# Altium PCB KUOZHAN.PCBDOC (part 15 of 21)
Units mm, origin at the board's own origin, x right, y up, seen from the top; angles counter-clockwise.
Board outline 165.51 x 116.38 mm, 2 copper layers (Top Layer, Bottom Layer); 171 components, 245 nets, 894 pads, 298 vias.
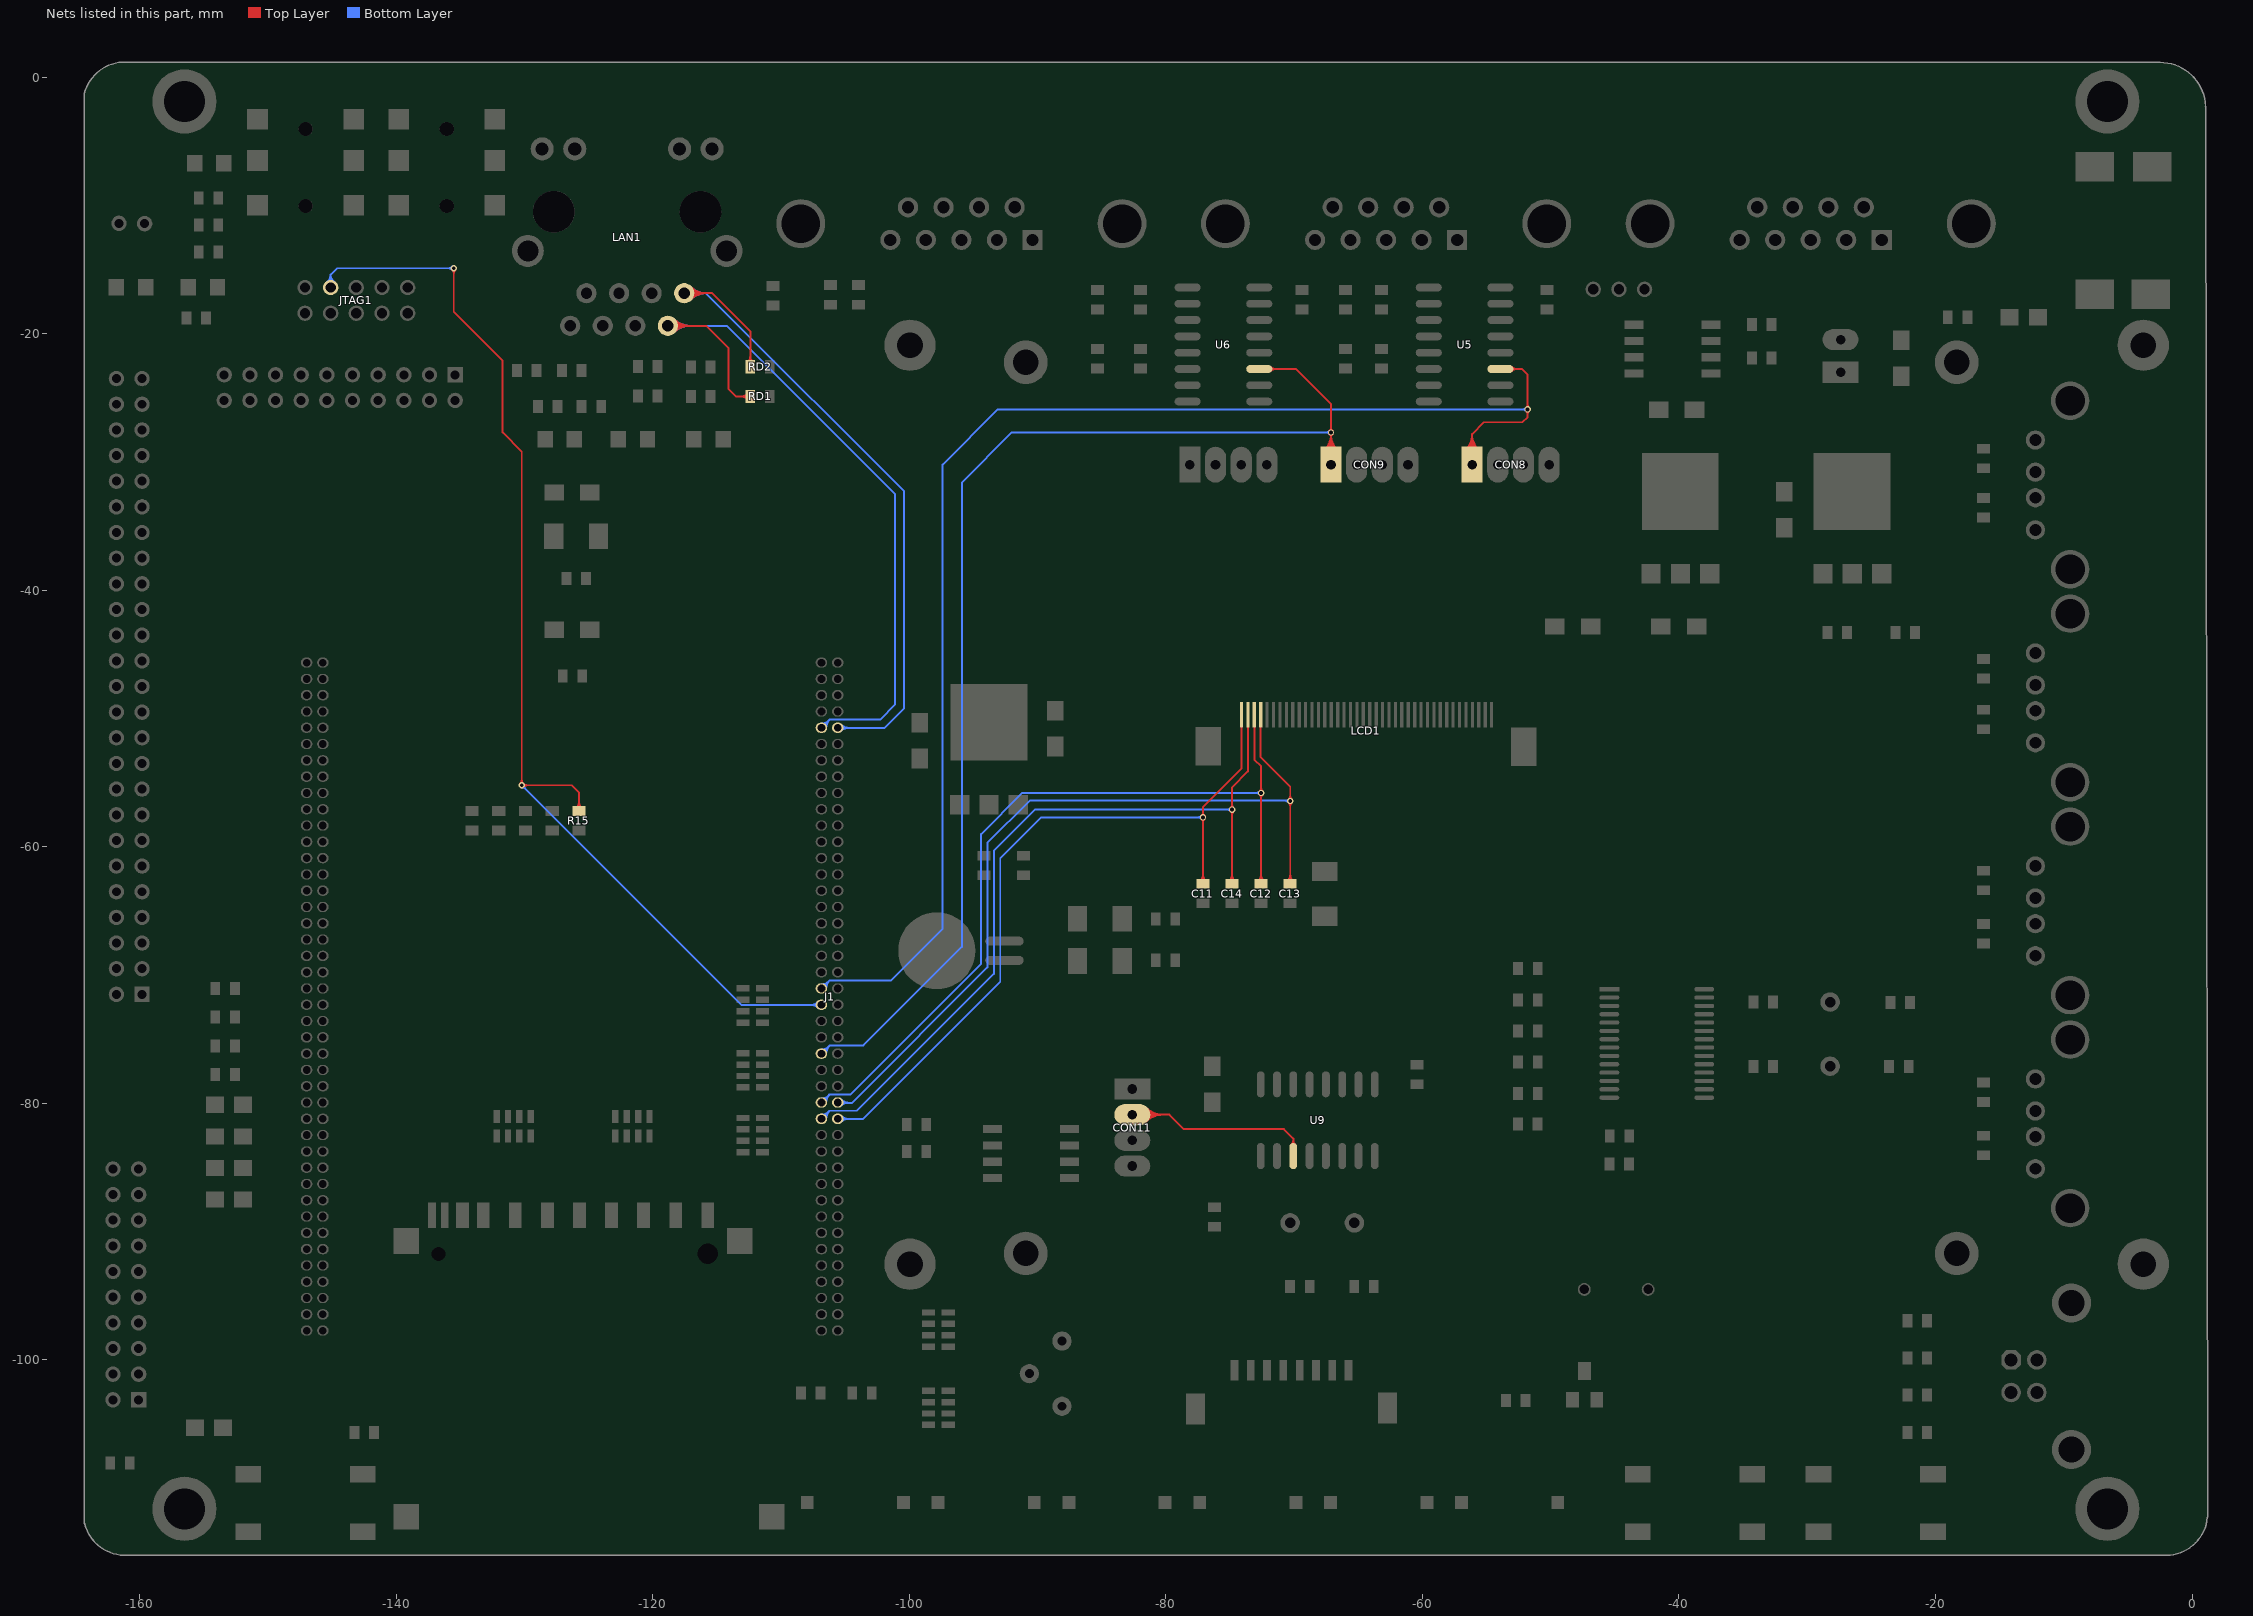
[diagram p15: the nets of this part, all layers, seen from the top]

## Via types
v1: diameter 0.5, hole 0.3, Top Layer to Bottom Layer, 272 vias
v2: diameter 0.6, hole 0.3, Top Layer to Bottom Layer, 24 vias
v3: diameter 0.9, hole 0.9, Top Layer to Bottom Layer, 2 vias

## Nets (pads, with @x,y where several pads share a name; then routed paths per layer and width w, separated by ;. In a path a pad name is that pad's centre, name@x,y a point inside that pad or via, vN(x,y) a via of type N, cw(c..) or ccw(c..) an arc to the next point about the centre after c; other vN are vias at no path point) (continued)
TMS: J1.43 JTAG1.7 R15.2 | length 131.8
  Top Layer w0.15: v1@-135.588,-14.988 cw(c-135.802,-15.202) -135.5,-15.202 cw(c-135.198,-15.202) v1@-135.412,-14.988 ; v1(-135.5,-14.9) -135.5,-18.293 -131.7,-22.093 -131.7,-27.7 -130.2,-29.2 v1(-130.2,-55.2) -126.3,-55.2 -125.741,-55.759 R15.2@-125.741,-57.2 ; v1@-130.288,-55.112 ccw(c-130.502,-54.898) -130.2,-54.898 ccw(c-129.898,-54.898) -130.112,-55.112 ccw(c-129.898,-54.898) -129.898,-55.2 ccw(c-129.898,-55.502) v1@-130.112,-55.288 ; v1@-135.624,-15.024 cw(c-135.922,-15.322) -135.5,-15.322 ; v1@-135.624,-15.024 cw(c-135.922,-15.322) -135.5,-15.322 ; v1@-135.624,-15.024 cw(c-135.922,-15.322) -135.5,-15.322 ; v1@-135.624,-15.024 cw(c-135.922,-15.322) -135.5,-15.322 ; -135.5,-15.322 cw(c-135.078,-15.322) v1@-135.376,-15.024 ; -135.5,-15.322 cw(c-135.078,-15.322) v1@-135.376,-15.024 ; -135.5,-15.322 cw(c-135.078,-15.322) v1@-135.376,-15.024 ; -135.5,-15.322 cw(c-135.078,-15.322) v1@-135.376,-15.024 ; v1@-130.324,-55.076 ccw(c-130.622,-54.778) -130.2,-54.778 ; v1@-130.324,-55.076 ccw(c-130.622,-54.778) -130.2,-54.778 ; v1@-130.324,-55.076 ccw(c-130.622,-54.778) -130.2,-54.778 ; v1@-130.324,-55.076 ccw(c-130.622,-54.778) -130.2,-54.778 ; -130.2,-54.778 ccw(c-129.778,-54.778) v1@-130.076,-55.076 ; -130.2,-54.778 ccw(c-129.778,-54.778) v1@-130.076,-55.076 ; -130.2,-54.778 ccw(c-129.778,-54.778) v1@-130.076,-55.076 ; -130.2,-54.778 ccw(c-129.778,-54.778) v1@-130.076,-55.076 ; v1@-130.076,-55.324 cw(c-129.778,-55.622) -129.778,-55.2 ; v1@-130.076,-55.324 cw(c-129.778,-55.622) -129.778,-55.2 ; v1@-130.076,-55.324 cw(c-129.778,-55.622) -129.778,-55.2 ; v1@-130.076,-55.324 cw(c-129.778,-55.622) -129.778,-55.2 ; v1@-130.076,-55.076 ccw(c-129.778,-54.778) -129.778,-55.2 ; v1@-130.076,-55.076 ccw(c-129.778,-54.778) -129.778,-55.2 ; v1@-130.076,-55.076 ccw(c-129.778,-54.778) -129.778,-55.2 ; v1@-130.076,-55.076 ccw(c-129.778,-54.778) -129.778,-55.2 ; R15.2@-125.957,-56.984 ccw(c-126.48,-56.461) -125.741,-56.461 ; R15.2@-125.957,-56.984 ccw(c-126.48,-56.461) -125.741,-56.461 ; R15.2@-125.957,-56.984 ccw(c-126.48,-56.461) -125.741,-56.461 ; R15.2@-125.957,-56.984 ccw(c-126.48,-56.461) -125.741,-56.461 ; R15.2@-125.957,-56.984 ccw(c-126.48,-56.461) -125.741,-56.461 ; -125.741,-56.461 ccw(c-125.002,-56.461) R15.2@-125.524,-56.984 ; -125.741,-56.461 ccw(c-125.002,-56.461) R15.2@-125.524,-56.984 ; -125.741,-56.461 ccw(c-125.002,-56.461) R15.2@-125.524,-56.984 ; -125.741,-56.461 ccw(c-125.002,-56.461) R15.2@-125.524,-56.984 ; -125.741,-56.461 ccw(c-125.002,-56.461) R15.2@-125.524,-56.984
  Bottom Layer w0.15: JTAG1.7@-145.099,-16.403 -145.099,-15.399 ; v1@-135.588,-14.988 ccw(c-135.802,-15.202) -135.802,-14.9 ccw(c-135.802,-14.598) v1@-135.588,-14.812 ; v1(-135.5,-14.9) -144.6,-14.9 -145.099,-15.399 ; v1@-130.2,-55.325 cw(c-130.2,-55.627) -129.987,-55.413 cw(c-129.773,-55.2) v1@-130.075,-55.2 ; v1(-130.2,-55.2) -113.073,-72.327 J1.43@-106.841,-72.327 ; JTAG1.7@-145.398,-15.971 ccw(c-145.796,-15.399) -145.099,-15.399 ; JTAG1.7@-145.398,-15.971 ccw(c-145.796,-15.399) -145.099,-15.399 ; JTAG1.7@-145.398,-15.971 ccw(c-145.796,-15.399) -145.099,-15.399 ; JTAG1.7@-145.398,-15.971 ccw(c-145.796,-15.399) -145.099,-15.399 ; JTAG1.7@-145.398,-15.971 ccw(c-145.796,-15.399) -145.099,-15.399 ; JTAG1.7@-145.313,-16.095 ccw(c-145.597,-15.686) -145.099,-15.686 ; JTAG1.7@-145.313,-16.095 ccw(c-145.597,-15.686) -145.099,-15.686 ; JTAG1.7@-145.313,-16.095 ccw(c-145.597,-15.686) -145.099,-15.686 ; JTAG1.7@-145.313,-16.095 ccw(c-145.597,-15.686) -145.099,-15.686 ; JTAG1.7@-145.313,-16.095 ccw(c-145.597,-15.686) -145.099,-15.686 ; -145.099,-15.686 ccw(c-144.601,-15.686) JTAG1.7@-144.885,-16.095 ; -145.099,-15.686 ccw(c-144.601,-15.686) JTAG1.7@-144.885,-16.095 ; -145.099,-15.686 ccw(c-144.601,-15.686) JTAG1.7@-144.885,-16.095 ; -145.099,-15.686 ccw(c-144.601,-15.686) JTAG1.7@-144.885,-16.095 ; -145.099,-15.686 ccw(c-144.601,-15.686) JTAG1.7@-144.885,-16.095 ; -145.099,-15.399 ccw(c-144.402,-15.399) JTAG1.7@-144.799,-15.971 ; -145.099,-15.399 ccw(c-144.402,-15.399) JTAG1.7@-144.799,-15.971 ; -145.099,-15.399 ccw(c-144.402,-15.399) JTAG1.7@-144.799,-15.971 ; -145.099,-15.399 ccw(c-144.402,-15.399) JTAG1.7@-144.799,-15.971 ; -145.099,-15.399 ccw(c-144.402,-15.399) JTAG1.7@-144.799,-15.971 ; -135.922,-14.9 cw(c-135.922,-15.322) v1@-135.624,-15.024 ; -135.922,-14.9 ccw(c-135.922,-14.478) v1@-135.624,-14.776 ; -135.922,-14.9 cw(c-135.922,-15.322) v1@-135.624,-15.024 ; -135.922,-14.9 ccw(c-135.922,-14.478) v1@-135.624,-14.776 ; -135.922,-14.9 cw(c-135.922,-15.322) v1@-135.624,-15.024 ; -135.922,-14.9 ccw(c-135.922,-14.478) v1@-135.624,-14.776 ; -135.922,-14.9 ccw(c-135.922,-14.478) v1@-135.624,-14.776 ; -135.922,-14.9 cw(c-135.922,-15.322) v1@-135.624,-15.024 ; v1@-130.2,-55.375 cw(c-130.2,-55.797) -129.901,-55.499 ; v1@-130.2,-55.375 cw(c-130.2,-55.797) -129.901,-55.499 ; v1@-130.2,-55.375 cw(c-130.2,-55.797) -129.901,-55.499 ; v1@-130.2,-55.375 cw(c-130.2,-55.797) -129.901,-55.499 ; v1@-130.025,-55.2 ccw(c-129.603,-55.2) -129.901,-55.499 ; v1@-130.025,-55.2 ccw(c-129.603,-55.2) -129.901,-55.499 ; v1@-130.025,-55.2 ccw(c-129.603,-55.2) -129.901,-55.499 ; v1@-130.025,-55.2 ccw(c-129.603,-55.2) -129.901,-55.499 ; -107.625,-72.327 cw(c-107.625,-73.111) J1.43@-107.071,-72.557 ; -107.625,-72.327 ccw(c-107.625,-71.542) J1.43@-107.071,-72.097 ; -107.625,-72.327 cw(c-107.625,-73.111) J1.43@-107.071,-72.557 ; -107.625,-72.327 ccw(c-107.625,-71.542) J1.43@-107.071,-72.097 ; -107.625,-72.327 cw(c-107.625,-73.111) J1.43@-107.071,-72.557 ; -107.625,-72.327 ccw(c-107.625,-71.542) J1.43@-107.071,-72.097 ; J1.43@-107.263,-72.327 cw(c-107.263,-72.749) J1.43@-106.965,-72.451 ; J1.43@-107.263,-72.327 ccw(c-107.263,-71.904) J1.43@-106.965,-72.203 ; J1.43@-107.263,-72.327 cw(c-107.263,-72.749) J1.43@-106.965,-72.451 ; J1.43@-107.263,-72.327 ccw(c-107.263,-71.904) J1.43@-106.965,-72.203 ; J1.43@-107.263,-72.327 cw(c-107.263,-72.749) J1.43@-106.965,-72.451 ; J1.43@-107.263,-72.327 ccw(c-107.263,-71.904) J1.43@-106.965,-72.203 ; -107.718,-72.327 ccw(c-107.718,-71.482) -107.121,-72.08 cw(c-107.718,-71.482) -107.718,-72.327 ; -107.633,-72.327 cw(c-107.633,-73.052) -107.121,-72.539 ccw(c-107.633,-73.052) -107.633,-72.327 ; -107.356,-72.327 ccw(c-107.356,-71.845) -107.015,-72.186 cw(c-107.356,-71.845) -107.356,-72.327
TSXM: C13.2 J1.56 LCD1.37 | length 89
  Top Layer w0.15: LCD1.37@-72.6,-49.7 -72.6,-53 -70.3,-55.3 v1(-70.3,-56.426) C13.2@-70.3,-62.876 ; v1@-70.388,-56.514 cw(c-70.602,-56.727) -70.3,-56.727 cw(c-69.998,-56.727) v1@-70.212,-56.514 ; v1@-70.388,-56.337 ccw(c-70.602,-56.124) -70.3,-56.124 ccw(c-69.998,-56.124) v1@-70.212,-56.337 ; C13.2@-70.516,-62.66 ccw(c-71.039,-62.137) -70.3,-62.137 ; C13.2@-70.516,-62.66 ccw(c-71.039,-62.137) -70.3,-62.137 ; C13.2@-70.516,-62.66 ccw(c-71.039,-62.137) -70.3,-62.137 ; C13.2@-70.516,-62.66 ccw(c-71.039,-62.137) -70.3,-62.137 ; C13.2@-70.516,-62.66 ccw(c-71.039,-62.137) -70.3,-62.137 ; v1@-70.424,-56.549 cw(c-70.722,-56.848) -70.3,-56.848 ; v1@-70.424,-56.549 cw(c-70.722,-56.848) -70.3,-56.848 ; v1@-70.424,-56.549 cw(c-70.722,-56.848) -70.3,-56.848 ; v1@-70.424,-56.549 cw(c-70.722,-56.848) -70.3,-56.848 ; v1@-70.424,-56.302 ccw(c-70.722,-56.003) -70.3,-56.003 ; v1@-70.424,-56.302 ccw(c-70.722,-56.003) -70.3,-56.003 ; v1@-70.424,-56.302 ccw(c-70.722,-56.003) -70.3,-56.003 ; v1@-70.424,-56.302 ccw(c-70.722,-56.003) -70.3,-56.003 ; -70.3,-62.137 ccw(c-69.561,-62.137) C13.2@-70.084,-62.66 ; -70.3,-62.137 ccw(c-69.561,-62.137) C13.2@-70.084,-62.66 ; -70.3,-62.137 ccw(c-69.561,-62.137) C13.2@-70.084,-62.66 ; -70.3,-62.137 ccw(c-69.561,-62.137) C13.2@-70.084,-62.66 ; -70.3,-62.137 ccw(c-69.561,-62.137) C13.2@-70.084,-62.66 ; -70.3,-56.848 cw(c-69.878,-56.848) v1@-70.176,-56.549 ; -70.3,-56.848 cw(c-69.878,-56.848) v1@-70.176,-56.549 ; -70.3,-56.848 cw(c-69.878,-56.848) v1@-70.176,-56.549 ; -70.3,-56.848 cw(c-69.878,-56.848) v1@-70.176,-56.549 ; -70.3,-56.003 ccw(c-69.878,-56.003) v1@-70.176,-56.302 ; -70.3,-56.003 ccw(c-69.878,-56.003) v1@-70.176,-56.302 ; -70.3,-56.003 ccw(c-69.878,-56.003) v1@-70.176,-56.302 ; -70.3,-56.003 ccw(c-69.878,-56.003) v1@-70.176,-56.302
  Bottom Layer w0.15: J1.56@-105.571,-79.952 -104.452,-79.952 -93.9,-69.4 -93.9,-59.7 -90.6,-56.4 v1@-70.3,-56.4 ; -70.664,-56.4 cw(c-70.664,-56.789) v1@-70.388,-56.514 ; v1@-70.54,-56.4 ccw(c-70.54,-56.186) v1@-70.388,-56.337 ; J1.56@-105.447,-80.076 cw(c-105.148,-80.375) J1.56@-105.148,-79.952 ; J1.56@-105.447,-80.076 cw(c-105.148,-80.375) J1.56@-105.148,-79.952 ; J1.56@-105.447,-80.076 cw(c-105.148,-80.375) J1.56@-105.148,-79.952 ; J1.56@-105.447,-79.828 ccw(c-105.148,-79.53) J1.56@-105.148,-79.952 ; J1.56@-105.447,-79.828 ccw(c-105.148,-79.53) J1.56@-105.148,-79.952 ; J1.56@-105.447,-79.828 ccw(c-105.148,-79.53) J1.56@-105.148,-79.952 ; J1.56@-105.341,-80.182 cw(c-104.786,-80.737) -104.786,-79.952 ; J1.56@-105.341,-80.182 cw(c-104.786,-80.737) -104.786,-79.952 ; J1.56@-105.341,-80.182 cw(c-104.786,-80.737) -104.786,-79.952 ; J1.56@-105.341,-79.722 ccw(c-104.786,-79.167) -104.786,-79.952 ; J1.56@-105.341,-79.722 ccw(c-104.786,-79.167) -104.786,-79.952 ; J1.56@-105.341,-79.722 ccw(c-104.786,-79.167) -104.786,-79.952 ; -70.784,-56.4 cw(c-70.784,-56.91) v1@-70.424,-56.549 ; -70.784,-56.4 cw(c-70.784,-56.91) v1@-70.424,-56.549 ; -70.784,-56.4 cw(c-70.784,-56.91) v1@-70.424,-56.549 ; -70.784,-56.4 cw(c-70.784,-56.91) v1@-70.424,-56.549 ; -70.661,-56.4 ccw(c-70.661,-56.065) v1@-70.424,-56.302 ; -70.661,-56.4 ccw(c-70.661,-56.065) v1@-70.424,-56.302 ; -70.661,-56.4 ccw(c-70.661,-56.065) v1@-70.424,-56.302 ; -70.661,-56.4 ccw(c-70.661,-56.065) v1@-70.424,-56.302 ; J1.56@-105.397,-79.806 ccw(c-105.043,-79.452) -105.043,-79.952 cw(c-105.043,-79.452) J1.56@-105.397,-79.806 ; J1.56@-105.291,-80.159 cw(c-104.791,-80.659) -104.791,-79.952 ccw(c-104.791,-80.659) J1.56@-105.291,-80.159 ; J1.56@-105.291,-79.7 ccw(c-104.681,-79.09) -104.681,-79.952 cw(c-104.681,-79.09) J1.56@-105.291,-79.7
TSXP: C12.2 J1.55 LCD1.38 | length 91.9
  Top Layer w0.15: LCD1.38@-73.1,-49.7 -73.1,-53.2 -72.567,-53.733 v1(-72.567,-55.8) C12.2@-72.567,-62.876 ; v1@-72.655,-55.888 cw(c-72.868,-56.102) -72.567,-56.102 cw(c-72.265,-56.102) v1@-72.478,-55.888 ; v1@-72.655,-55.712 ccw(c-72.868,-55.498) -72.567,-55.498 ccw(c-72.265,-55.498) v1@-72.478,-55.712 ; C12.2@-72.783,-62.66 ccw(c-73.305,-62.137) -72.567,-62.137 ; C12.2@-72.783,-62.66 ccw(c-73.305,-62.137) -72.567,-62.137 ; C12.2@-72.783,-62.66 ccw(c-73.305,-62.137) -72.567,-62.137 ; C12.2@-72.783,-62.66 ccw(c-73.305,-62.137) -72.567,-62.137 ; C12.2@-72.783,-62.66 ccw(c-73.305,-62.137) -72.567,-62.137 ; v1@-72.69,-55.924 cw(c-72.989,-56.222) -72.567,-56.222 ; v1@-72.69,-55.924 cw(c-72.989,-56.222) -72.567,-56.222 ; v1@-72.69,-55.924 cw(c-72.989,-56.222) -72.567,-56.222 ; v1@-72.69,-55.924 cw(c-72.989,-56.222) -72.567,-56.222 ; v1@-72.69,-55.676 ccw(c-72.989,-55.378) -72.567,-55.378 ; v1@-72.69,-55.676 ccw(c-72.989,-55.378) -72.567,-55.378 ; v1@-72.69,-55.676 ccw(c-72.989,-55.378) -72.567,-55.378 ; v1@-72.69,-55.676 ccw(c-72.989,-55.378) -72.567,-55.378 ; -72.567,-62.137 ccw(c-71.828,-62.137) C12.2@-72.35,-62.66 ; -72.567,-62.137 ccw(c-71.828,-62.137) C12.2@-72.35,-62.66 ; -72.567,-62.137 ccw(c-71.828,-62.137) C12.2@-72.35,-62.66 ; -72.567,-62.137 ccw(c-71.828,-62.137) C12.2@-72.35,-62.66 ; -72.567,-62.137 ccw(c-71.828,-62.137) C12.2@-72.35,-62.66 ; -72.567,-56.222 cw(c-72.144,-56.222) v1@-72.443,-55.924 ; -72.567,-56.222 cw(c-72.144,-56.222) v1@-72.443,-55.924 ; -72.567,-56.222 cw(c-72.144,-56.222) v1@-72.443,-55.924 ; -72.567,-56.222 cw(c-72.144,-56.222) v1@-72.443,-55.924 ; -72.567,-55.378 ccw(c-72.144,-55.378) v1@-72.443,-55.676 ; -72.567,-55.378 ccw(c-72.144,-55.378) v1@-72.443,-55.676 ; -72.567,-55.378 ccw(c-72.144,-55.378) v1@-72.443,-55.676 ; -72.567,-55.378 ccw(c-72.144,-55.378) v1@-72.443,-55.676
  Bottom Layer w0.15: J1.55@-106.841,-79.952 -106.195,-79.306 ; J1.55@-106.841,-79.929 -106.211,-79.3 ; -104.612,-79.3 -106.211,-79.3 ; -104.606,-79.306 -94.4,-69.1 -94.4,-59 -91.2,-55.8 v1(-72.567,-55.8) ; v1@-72.655,-55.888 ccw(c-72.868,-56.102) -72.868,-55.8 ccw(c-72.868,-55.498) v1@-72.655,-55.712 ; J1.55@-106.841,-79.777 ccw(c-106.841,-79.355) J1.55@-106.542,-79.653 ; J1.55@-106.841,-79.777 ccw(c-106.841,-79.355) J1.55@-106.542,-79.653 ; J1.55@-106.841,-79.777 ccw(c-106.841,-79.355) J1.55@-106.542,-79.653 ; J1.55@-106.841,-79.627 ccw(c-106.841,-78.842) -106.286,-79.397 ; J1.55@-106.841,-79.627 ccw(c-106.841,-78.842) -106.286,-79.397 ; J1.55@-106.841,-79.627 ccw(c-106.841,-78.842) -106.286,-79.397 ; J1.55@-106.791,-79.604 ccw(c-106.791,-78.94) -106.321,-79.41 cw(c-106.791,-78.94) J1.55@-106.791,-79.604 ; J1.55@-106.791,-79.604 ccw(c-106.791,-78.885) -106.282,-79.394 cw(c-106.791,-78.885) J1.55@-106.791,-79.604 ; J1.55@-106.666,-79.952 cw(c-106.243,-79.952) J1.55@-106.542,-79.653 ; J1.55@-106.666,-79.952 cw(c-106.243,-79.952) J1.55@-106.542,-79.653 ; J1.55@-106.666,-79.952 cw(c-106.243,-79.952) J1.55@-106.542,-79.653 ; J1.55@-106.516,-79.952 cw(c-105.731,-79.952) -106.286,-79.397 ; J1.55@-106.516,-79.952 cw(c-105.731,-79.952) -106.286,-79.397 ; J1.55@-106.516,-79.952 cw(c-105.731,-79.952) -106.286,-79.397 ; -106.212,-79.3 ccw(c-105.597,-79.914) -106.466,-79.925 cw(c-105.597,-79.914) -106.212,-79.3 ; -72.989,-55.8 cw(c-72.989,-56.222) v1@-72.69,-55.924 ; -72.989,-55.8 ccw(c-72.989,-55.378) v1@-72.69,-55.676 ; -72.989,-55.8 cw(c-72.989,-56.222) v1@-72.69,-55.924 ; -72.989,-55.8 ccw(c-72.989,-55.378) v1@-72.69,-55.676 ; -72.989,-55.8 cw(c-72.989,-56.222) v1@-72.69,-55.924 ; -72.989,-55.8 ccw(c-72.989,-55.378) v1@-72.69,-55.676 ; -72.989,-55.8 ccw(c-72.989,-55.378) v1@-72.69,-55.676 ; -72.989,-55.8 cw(c-72.989,-56.222) v1@-72.69,-55.924 ; J1.55@-106.616,-79.929 cw(c-106.128,-79.929) -106.473,-79.584 ccw(c-106.128,-79.929) J1.55@-106.616,-79.929 ; J1.55@-106.616,-79.927 cw(c-106.094,-79.92) -106.463,-79.552 ccw(c-106.094,-79.92) J1.55@-106.616,-79.927 ; J1.55@-106.466,-79.929 cw(c-105.615,-79.929) -106.217,-79.328 ccw(c-105.615,-79.929) J1.55@-106.466,-79.929
TSYM: C14.2 J1.57 LCD1.39 | length 89.5
  Top Layer w0.15: v1@-74.922,-57.188 cw(c-75.135,-57.402) -74.833,-57.402 cw(c-74.532,-57.402) v1@-74.745,-57.188 ; v1@-74.922,-57.012 ccw(c-75.135,-56.798) -74.833,-56.798 ccw(c-74.532,-56.798) v1@-74.745,-57.012 ; C14.2@-74.833,-62.876 v1(-74.833,-57.1) -74.833,-55.359 -73.6,-54.126 LCD1.39@-73.6,-49.7 ; C14.2@-75.05,-62.66 ccw(c-75.572,-62.137) -74.833,-62.137 ; C14.2@-75.05,-62.66 ccw(c-75.572,-62.137) -74.833,-62.137 ; C14.2@-75.05,-62.66 ccw(c-75.572,-62.137) -74.833,-62.137 ; C14.2@-75.05,-62.66 ccw(c-75.572,-62.137) -74.833,-62.137 ; C14.2@-75.05,-62.66 ccw(c-75.572,-62.137) -74.833,-62.137 ; v1@-74.957,-57.224 cw(c-75.256,-57.522) -74.833,-57.522 ; v1@-74.957,-57.224 cw(c-75.256,-57.522) -74.833,-57.522 ; v1@-74.957,-57.224 cw(c-75.256,-57.522) -74.833,-57.522 ; v1@-74.957,-57.224 cw(c-75.256,-57.522) -74.833,-57.522 ; v1@-74.957,-56.976 ccw(c-75.256,-56.678) -74.833,-56.678 ; v1@-74.957,-56.976 ccw(c-75.256,-56.678) -74.833,-56.678 ; v1@-74.957,-56.976 ccw(c-75.256,-56.678) -74.833,-56.678 ; v1@-74.957,-56.976 ccw(c-75.256,-56.678) -74.833,-56.678 ; -74.833,-62.137 ccw(c-74.095,-62.137) C14.2@-74.617,-62.66 ; -74.833,-62.137 ccw(c-74.095,-62.137) C14.2@-74.617,-62.66 ; -74.833,-62.137 ccw(c-74.095,-62.137) C14.2@-74.617,-62.66 ; -74.833,-62.137 ccw(c-74.095,-62.137) C14.2@-74.617,-62.66 ; -74.833,-62.137 ccw(c-74.095,-62.137) C14.2@-74.617,-62.66 ; -74.833,-57.522 cw(c-74.411,-57.522) v1@-74.71,-57.224 ; -74.833,-57.522 cw(c-74.411,-57.522) v1@-74.71,-57.224 ; -74.833,-57.522 cw(c-74.411,-57.522) v1@-74.71,-57.224 ; -74.833,-57.522 cw(c-74.411,-57.522) v1@-74.71,-57.224 ; -74.833,-56.678 ccw(c-74.411,-56.678) v1@-74.71,-56.976 ; -74.833,-56.678 ccw(c-74.411,-56.678) v1@-74.71,-56.976 ; -74.833,-56.678 ccw(c-74.411,-56.678) v1@-74.71,-56.976 ; -74.833,-56.678 ccw(c-74.411,-56.678) v1@-74.71,-56.976
  Bottom Layer w0.15: J1.57@-106.841,-81.223 -106.216,-80.598 ; J1.57@-106.841,-81.199 -106.216,-80.574 ; v1@-74.922,-57.188 ccw(c-75.135,-57.402) -75.135,-57.1 ccw(c-75.135,-56.798) v1@-74.922,-57.012 ; v1(-74.833,-57.1) -90.2,-57.1 -93.4,-60.3 -93.4,-69.9 -104.074,-80.574 -106.216,-80.574 ; J1.57@-106.841,-81.048 ccw(c-106.841,-80.626) J1.57@-106.542,-80.924 ; J1.57@-106.841,-81.048 ccw(c-106.841,-80.626) J1.57@-106.542,-80.924 ; J1.57@-106.841,-81.048 ccw(c-106.841,-80.626) J1.57@-106.542,-80.924 ; J1.57@-106.841,-80.898 ccw(c-106.841,-80.113) -106.286,-80.668 ; J1.57@-106.841,-80.898 ccw(c-106.841,-80.113) -106.286,-80.668 ; J1.57@-106.841,-80.898 ccw(c-106.841,-80.113) -106.286,-80.668 ; J1.57@-106.791,-80.874 ccw(c-106.791,-80.21) -106.321,-80.68 cw(c-106.791,-80.21) J1.57@-106.791,-80.874 ; J1.57@-106.791,-80.874 ccw(c-106.791,-80.153) -106.281,-80.663 cw(c-106.791,-80.153) J1.57@-106.791,-80.874 ; J1.57@-106.666,-81.223 cw(c-106.243,-81.223) J1.57@-106.542,-80.924 ; J1.57@-106.666,-81.223 cw(c-106.243,-81.223) J1.57@-106.542,-80.924 ; J1.57@-106.666,-81.223 cw(c-106.243,-81.223) J1.57@-106.542,-80.924 ; J1.57@-106.516,-81.223 cw(c-105.731,-81.223) -106.286,-80.668 ; J1.57@-106.516,-81.223 cw(c-105.731,-81.223) -106.286,-80.668 ; J1.57@-106.516,-81.223 cw(c-105.731,-81.223) -106.286,-80.668 ; -106.216,-80.574 ccw(c-105.612,-81.178) -106.466,-81.194 cw(c-105.612,-81.178) -106.216,-80.574 ; -75.256,-57.1 cw(c-75.256,-57.522) v1@-74.957,-57.224 ; -75.256,-57.1 ccw(c-75.256,-56.678) v1@-74.957,-56.976 ; -75.256,-57.1 cw(c-75.256,-57.522) v1@-74.957,-57.224 ; -75.256,-57.1 ccw(c-75.256,-56.678) v1@-74.957,-56.976 ; -75.256,-57.1 cw(c-75.256,-57.522) v1@-74.957,-57.224 ; -75.256,-57.1 ccw(c-75.256,-56.678) v1@-74.957,-56.976 ; -75.256,-57.1 ccw(c-75.256,-56.678) v1@-74.957,-56.976 ; -75.256,-57.1 cw(c-75.256,-57.522) v1@-74.957,-57.224 ; J1.57@-106.616,-81.199 cw(c-106.13,-81.199) -106.473,-80.856 ccw(c-106.13,-81.199) J1.57@-106.616,-81.199 ; J1.57@-106.616,-81.196 cw(c-106.103,-81.187) -106.466,-80.824 ccw(c-106.103,-81.187) J1.57@-106.616,-81.196 ; J1.57@-106.466,-81.199 cw(c-105.618,-81.199) -106.217,-80.6 ccw(c-105.618,-81.199) J1.57@-106.466,-81.199
TSYP: C11.2 J1.58 LCD1.40 | length 82.4
  Top Layer w0.15: v1@-77.188,-57.788 cw(c-77.402,-58.002) -77.1,-58.002 cw(c-76.798,-58.002) v1@-77.012,-57.788 ; v1@-77.188,-57.612 ccw(c-77.402,-57.398) -77.1,-57.398 ccw(c-76.798,-57.398) v1@-77.012,-57.612 ; C11.2@-77.1,-62.876 -77.1,-56.9 -74.1,-53.9 LCD1.40@-74.1,-49.7 ; C11.2@-77.316,-62.66 ccw(c-77.839,-62.137) -77.1,-62.137 ; C11.2@-77.316,-62.66 ccw(c-77.839,-62.137) -77.1,-62.137 ; C11.2@-77.316,-62.66 ccw(c-77.839,-62.137) -77.1,-62.137 ; C11.2@-77.316,-62.66 ccw(c-77.839,-62.137) -77.1,-62.137 ; C11.2@-77.316,-62.66 ccw(c-77.839,-62.137) -77.1,-62.137 ; v1@-77.224,-57.824 cw(c-77.522,-58.122) -77.1,-58.122 ; v1@-77.224,-57.824 cw(c-77.522,-58.122) -77.1,-58.122 ; v1@-77.224,-57.824 cw(c-77.522,-58.122) -77.1,-58.122 ; v1@-77.224,-57.824 cw(c-77.522,-58.122) -77.1,-58.122 ; v1@-77.224,-57.576 ccw(c-77.522,-57.278) -77.1,-57.278 ; v1@-77.224,-57.576 ccw(c-77.522,-57.278) -77.1,-57.278 ; v1@-77.224,-57.576 ccw(c-77.522,-57.278) -77.1,-57.278 ; v1@-77.224,-57.576 ccw(c-77.522,-57.278) -77.1,-57.278 ; -77.1,-62.137 ccw(c-76.361,-62.137) C11.2@-76.884,-62.66 ; -77.1,-62.137 ccw(c-76.361,-62.137) C11.2@-76.884,-62.66 ; -77.1,-62.137 ccw(c-76.361,-62.137) C11.2@-76.884,-62.66 ; -77.1,-62.137 ccw(c-76.361,-62.137) C11.2@-76.884,-62.66 ; -77.1,-62.137 ccw(c-76.361,-62.137) C11.2@-76.884,-62.66 ; -77.1,-58.122 cw(c-76.678,-58.122) v1@-76.976,-57.824 ; -77.1,-58.122 cw(c-76.678,-58.122) v1@-76.976,-57.824 ; -77.1,-58.122 cw(c-76.678,-58.122) v1@-76.976,-57.824 ; -77.1,-58.122 cw(c-76.678,-58.122) v1@-76.976,-57.824 ; -77.1,-57.278 ccw(c-76.678,-57.278) v1@-76.976,-57.576 ; -77.1,-57.278 ccw(c-76.678,-57.278) v1@-76.976,-57.576 ; -77.1,-57.278 ccw(c-76.678,-57.278) v1@-76.976,-57.576 ; -77.1,-57.278 ccw(c-76.678,-57.278) v1@-76.976,-57.576
  Bottom Layer w0.15: J1.58@-105.571,-81.223 -103.623,-81.223 -92.9,-70.5 -92.9,-60.9 -89.7,-57.7 v1(-77.1,-57.7) ; v1@-77.188,-57.788 ccw(c-77.402,-58.002) -77.402,-57.7 ccw(c-77.402,-57.398) v1@-77.188,-57.612 ; J1.58@-105.447,-81.347 cw(c-105.148,-81.645) J1.58@-105.148,-81.223 ; J1.58@-105.447,-81.347 cw(c-105.148,-81.645) J1.58@-105.148,-81.223 ; J1.58@-105.447,-81.347 cw(c-105.148,-81.645) J1.58@-105.148,-81.223 ; J1.58@-105.447,-81.099 ccw(c-105.148,-80.801) J1.58@-105.148,-81.223 ; J1.58@-105.447,-81.099 ccw(c-105.148,-80.801) J1.58@-105.148,-81.223 ; J1.58@-105.447,-81.099 ccw(c-105.148,-80.801) J1.58@-105.148,-81.223 ; J1.58@-105.341,-81.453 cw(c-104.786,-82.008) -104.786,-81.223 ; J1.58@-105.341,-81.453 cw(c-104.786,-82.008) -104.786,-81.223 ; J1.58@-105.341,-81.453 cw(c-104.786,-82.008) -104.786,-81.223 ; J1.58@-105.341,-80.993 ccw(c-104.786,-80.438) -104.786,-81.223 ; J1.58@-105.341,-80.993 ccw(c-104.786,-80.438) -104.786,-81.223 ; J1.58@-105.341,-80.993 ccw(c-104.786,-80.438) -104.786,-81.223 ; -77.522,-57.7 cw(c-77.522,-58.122) v1@-77.224,-57.824 ; -77.522,-57.7 ccw(c-77.522,-57.278) v1@-77.224,-57.576 ; -77.522,-57.7 cw(c-77.522,-58.122) v1@-77.224,-57.824 ; -77.522,-57.7 ccw(c-77.522,-57.278) v1@-77.224,-57.576 ; -77.522,-57.7 cw(c-77.522,-58.122) v1@-77.224,-57.824 ; -77.522,-57.7 ccw(c-77.522,-57.278) v1@-77.224,-57.576 ; -77.522,-57.7 ccw(c-77.522,-57.278) v1@-77.224,-57.576 ; -77.522,-57.7 cw(c-77.522,-58.122) v1@-77.224,-57.824 ; J1.58@-105.397,-81.076 ccw(c-105.041,-80.72) -105.041,-81.223 cw(c-105.041,-80.72) J1.58@-105.397,-81.076 ; J1.58@-105.291,-81.429 cw(c-104.793,-81.927) -104.793,-81.223 ccw(c-104.793,-81.927) J1.58@-105.291,-81.429 ; J1.58@-105.291,-80.97 ccw(c-104.679,-80.358) -104.679,-81.223 cw(c-104.679,-80.358) J1.58@-105.291,-80.97
TX+: J1.10 LAN1.1 RD2.1 | length 133.6
  Top Layer w0.15: LAN1.1@-117.538,-16.844 -115.356,-16.844 -112.387,-19.813 RD2.1@-112.387,-22.576 ; LAN1.1@-117.246,-17.135 cw(c-116.542,-17.839) -116.542,-16.844 ; LAN1.1@-117.246,-17.135 cw(c-116.542,-17.839) -116.542,-16.844 ; LAN1.1@-117.246,-17.135 cw(c-116.542,-17.839) -116.542,-16.844 ; LAN1.1@-117.246,-17.135 cw(c-116.542,-17.839) -116.542,-16.844 ; LAN1.1@-117.246,-17.135 cw(c-116.542,-17.839) -116.542,-16.844 ; LAN1.1@-117.246,-16.552 ccw(c-116.542,-15.848) -116.542,-16.844 ; LAN1.1@-117.246,-16.552 ccw(c-116.542,-15.848) -116.542,-16.844 ; LAN1.1@-117.246,-16.552 ccw(c-116.542,-15.848) -116.542,-16.844 ; LAN1.1@-117.246,-16.552 ccw(c-116.542,-15.848) -116.542,-16.844 ; LAN1.1@-117.246,-16.552 ccw(c-116.542,-15.848) -116.542,-16.844 ; LAN1.1@-117.14,-17.241 cw(c-116.18,-18.202) -116.18,-16.844 ; LAN1.1@-117.14,-17.241 cw(c-116.18,-18.202) -116.18,-16.844 ; LAN1.1@-117.14,-17.241 cw(c-116.18,-18.202) -116.18,-16.844 ; LAN1.1@-117.14,-17.241 cw(c-116.18,-18.202) -116.18,-16.844 ; LAN1.1@-117.14,-17.241 cw(c-116.18,-18.202) -116.18,-16.844 ; LAN1.1@-117.14,-16.446 ccw(c-116.18,-15.486) -116.18,-16.844 ; LAN1.1@-117.14,-16.446 ccw(c-116.18,-15.486) -116.18,-16.844 ; LAN1.1@-117.14,-16.446 ccw(c-116.18,-15.486) -116.18,-16.844 ; LAN1.1@-117.14,-16.446 ccw(c-116.18,-15.486) -116.18,-16.844 ; LAN1.1@-117.14,-16.446 ccw(c-116.18,-15.486) -116.18,-16.844 ; LAN1.1@-117.034,-17.348 cw(c-115.818,-18.564) -115.818,-16.844 ; LAN1.1@-117.034,-17.348 cw(c-115.818,-18.564) -115.818,-16.844 ; LAN1.1@-117.034,-17.348 cw(c-115.818,-18.564) -115.818,-16.844 ; LAN1.1@-117.034,-17.348 cw(c-115.818,-18.564) -115.818,-16.844 ; LAN1.1@-117.034,-17.348 cw(c-115.818,-18.564) -115.818,-16.844 ; LAN1.1@-117.034,-16.34 ccw(c-115.818,-15.124) -115.818,-16.844 ; LAN1.1@-117.034,-16.34 ccw(c-115.818,-15.124) -115.818,-16.844 ; LAN1.1@-117.034,-16.34 ccw(c-115.818,-15.124) -115.818,-16.844 ; LAN1.1@-117.034,-16.34 ccw(c-115.818,-15.124) -115.818,-16.844 ; LAN1.1@-117.034,-16.34 ccw(c-115.818,-15.124) -115.818,-16.844 ; RD2.1@-112.604,-22.233 ccw(c-113.126,-21.71) -112.387,-21.71 ; RD2.1@-112.604,-22.233 ccw(c-113.126,-21.71) -112.387,-21.71 ; RD2.1@-112.604,-22.233 ccw(c-113.126,-21.71) -112.387,-21.71 ; RD2.1@-112.604,-22.233 ccw(c-113.126,-21.71) -112.387,-21.71 ; RD2.1@-112.604,-22.233 ccw(c-113.126,-21.71) -112.387,-21.71 ; -112.387,-21.71 ccw(c-111.649,-21.71) RD2.1@-112.171,-22.233 ; -112.387,-21.71 ccw(c-111.649,-21.71) RD2.1@-112.171,-22.233 ; -112.387,-21.71 ccw(c-111.649,-21.71) RD2.1@-112.171,-22.233 ; -112.387,-21.71 ccw(c-111.649,-21.71) RD2.1@-112.171,-22.233 ; -112.387,-21.71 ccw(c-111.649,-21.71) RD2.1@-112.171,-22.233
  Bottom Layer w0.15: LAN1.1@-117.538,-16.844 -115.856,-16.844 ; J1.10@-105.571,-50.722 -101.922,-50.722 -100.4,-49.2 -100.4,-32.3 -114.6,-18.1 -115.856,-16.844 ; LAN1.1@-117.242,-17.131 cw(c-116.564,-17.787) -116.564,-16.844 ; LAN1.1@-117.242,-17.131 cw(c-116.564,-17.787) -116.564,-16.844 ; LAN1.1@-117.242,-17.131 cw(c-116.564,-17.787) -116.564,-16.844 ; LAN1.1@-117.242,-17.131 cw(c-116.564,-17.787) -116.564,-16.844 ; LAN1.1@-117.242,-17.131 cw(c-116.564,-17.787) -116.564,-16.844 ; LAN1.1@-117.242,-16.557 ccw(c-116.564,-15.901) -116.564,-16.844 ; LAN1.1@-117.242,-16.557 ccw(c-116.564,-15.901) -116.564,-16.844 ; LAN1.1@-117.242,-16.557 ccw(c-116.564,-15.901) -116.564,-16.844 ; LAN1.1@-117.242,-16.557 ccw(c-116.564,-15.901) -116.564,-16.844 ; LAN1.1@-117.242,-16.557 ccw(c-116.564,-15.901) -116.564,-16.844 ; LAN1.1@-117.134,-17.235 cw(c-116.21,-18.13) -116.21,-16.844 ; LAN1.1@-117.134,-17.235 cw(c-116.21,-18.13) -116.21,-16.844 ; LAN1.1@-117.134,-17.235 cw(c-116.21,-18.13) -116.21,-16.844 ; LAN1.1@-117.134,-17.235 cw(c-116.21,-18.13) -116.21,-16.844 ; LAN1.1@-117.134,-17.235 cw(c-116.21,-18.13) -116.21,-16.844 ; LAN1.1@-117.134,-16.453 ccw(c-116.21,-15.558) -116.21,-16.844 ; LAN1.1@-117.134,-16.453 ccw(c-116.21,-15.558) -116.21,-16.844 ; LAN1.1@-117.134,-16.453 ccw(c-116.21,-15.558) -116.21,-16.844 ; LAN1.1@-117.134,-16.453 ccw(c-116.21,-15.558) -116.21,-16.844 ; LAN1.1@-117.134,-16.453 ccw(c-116.21,-15.558) -116.21,-16.844 ; LAN1.1@-117.026,-17.339 cw(c-115.856,-18.473) -115.856,-16.844 ; LAN1.1@-117.026,-17.339 cw(c-115.856,-18.473) -115.856,-16.844 ; LAN1.1@-117.026,-17.339 cw(c-115.856,-18.473) -115.856,-16.844 ; LAN1.1@-117.026,-17.339 cw(c-115.856,-18.473) -115.856,-16.844 ; LAN1.1@-117.026,-17.339 cw(c-115.856,-18.473) -115.856,-16.844 ; LAN1.1@-117.026,-16.348 ccw(c-115.856,-15.215) -115.856,-16.844 ; LAN1.1@-117.026,-16.348 ccw(c-115.856,-15.215) -115.856,-16.844 ; LAN1.1@-117.026,-16.348 ccw(c-115.856,-15.215) -115.856,-16.844 ; LAN1.1@-117.026,-16.348 ccw(c-115.856,-15.215) -115.856,-16.844 ; LAN1.1@-117.026,-16.348 ccw(c-115.856,-15.215) -115.856,-16.844 ; J1.10@-105.447,-50.846 cw(c-105.148,-51.144) J1.10@-105.148,-50.722 ; J1.10@-105.447,-50.846 cw(c-105.148,-51.144) J1.10@-105.148,-50.722 ; J1.10@-105.447,-50.846 cw(c-105.148,-51.144) J1.10@-105.148,-50.722 ; J1.10@-105.447,-50.598 ccw(c-105.148,-50.299) J1.10@-105.148,-50.722 ; J1.10@-105.447,-50.598 ccw(c-105.148,-50.299) J1.10@-105.148,-50.722 ; J1.10@-105.447,-50.598 ccw(c-105.148,-50.299) J1.10@-105.148,-50.722 ; J1.10@-105.341,-50.952 cw(c-104.786,-51.507) -104.786,-50.722 ; J1.10@-105.341,-50.952 cw(c-104.786,-51.507) -104.786,-50.722 ; J1.10@-105.341,-50.952 cw(c-104.786,-51.507) -104.786,-50.722 ; J1.10@-105.341,-50.492 ccw(c-104.786,-49.937) -104.786,-50.722 ; J1.10@-105.341,-50.492 ccw(c-104.786,-49.937) -104.786,-50.722 ; J1.10@-105.341,-50.492 ccw(c-104.786,-49.937) -104.786,-50.722 ; J1.10@-105.397,-50.843 cw(c-105.104,-51.136) -105.104,-50.722 ccw(c-105.104,-51.136) J1.10@-105.397,-50.843 ; J1.10@-105.397,-50.596 ccw(c-105.092,-50.291) -105.092,-50.722 cw(c-105.092,-50.291) J1.10@-105.397,-50.596 ; J1.10@-105.291,-50.949 cw(c-104.742,-51.498) -104.742,-50.722 ccw(c-104.742,-51.498) J1.10@-105.291,-50.949 ; J1.10@-105.291,-50.49 ccw(c-104.73,-49.929) -104.73,-50.722 cw(c-104.73,-49.929) J1.10@-105.291,-50.49
TX-: J1.9 LAN1.2 RD1.1 | length 139.5
  Top Layer w0.15: LAN1.2@-118.808,-19.384 -115.816,-19.384 -114.1,-21.1 -114.1,-24.3 -113.51,-24.89 RD1.1@-112.387,-24.89 ; LAN1.2@-118.516,-19.675 cw(c-117.812,-20.379) -117.812,-19.384 ; LAN1.2@-118.516,-19.675 cw(c-117.812,-20.379) -117.812,-19.384 ; LAN1.2@-118.516,-19.675 cw(c-117.812,-20.379) -117.812,-19.384 ; LAN1.2@-118.516,-19.675 cw(c-117.812,-20.379) -117.812,-19.384 ; LAN1.2@-118.516,-19.675 cw(c-117.812,-20.379) -117.812,-19.384 ; LAN1.2@-118.516,-19.092 ccw(c-117.812,-18.388) -117.812,-19.384 ; LAN1.2@-118.516,-19.092 ccw(c-117.812,-18.388) -117.812,-19.384 ; LAN1.2@-118.516,-19.092 ccw(c-117.812,-18.388) -117.812,-19.384 ; LAN1.2@-118.516,-19.092 ccw(c-117.812,-18.388) -117.812,-19.384 ; LAN1.2@-118.516,-19.092 ccw(c-117.812,-18.388) -117.812,-19.384 ; LAN1.2@-118.41,-19.781 cw(c-117.45,-20.742) -117.45,-19.384 ; LAN1.2@-118.41,-19.781 cw(c-117.45,-20.742) -117.45,-19.384 ; LAN1.2@-118.41,-19.781 cw(c-117.45,-20.742) -117.45,-19.384 ; LAN1.2@-118.41,-19.781 cw(c-117.45,-20.742) -117.45,-19.384 ; LAN1.2@-118.41,-19.781 cw(c-117.45,-20.742) -117.45,-19.384 ; LAN1.2@-118.41,-18.986 ccw(c-117.45,-18.026) -117.45,-19.384 ; LAN1.2@-118.41,-18.986 ccw(c-117.45,-18.026) -117.45,-19.384 ; LAN1.2@-118.41,-18.986 ccw(c-117.45,-18.026) -117.45,-19.384 ; LAN1.2@-118.41,-18.986 ccw(c-117.45,-18.026) -117.45,-19.384 ; LAN1.2@-118.41,-18.986 ccw(c-117.45,-18.026) -117.45,-19.384 ; LAN1.2@-118.304,-19.888 cw(c-117.088,-21.104) -117.088,-19.384 ; LAN1.2@-118.304,-19.888 cw(c-117.088,-21.104) -117.088,-19.384 ; LAN1.2@-118.304,-19.888 cw(c-117.088,-21.104) -117.088,-19.384 ; LAN1.2@-118.304,-19.888 cw(c-117.088,-21.104) -117.088,-19.384 ; LAN1.2@-118.304,-19.888 cw(c-117.088,-21.104) -117.088,-19.384 ; LAN1.2@-118.304,-18.88 ccw(c-117.088,-17.664) -117.088,-19.384 ; LAN1.2@-118.304,-18.88 ccw(c-117.088,-17.664) -117.088,-19.384 ; LAN1.2@-118.304,-18.88 ccw(c-117.088,-17.664) -117.088,-19.384 ; LAN1.2@-118.304,-18.88 ccw(c-117.088,-17.664) -117.088,-19.384 ; LAN1.2@-118.304,-18.88 ccw(c-117.088,-17.664) -117.088,-19.384 ; -113.126,-24.89 cw(c-113.126,-25.628) RD1.1@-112.604,-25.106 ; -113.126,-24.89 ccw(c-113.126,-24.151) RD1.1@-112.604,-24.673 ; -113.126,-24.89 cw(c-113.126,-25.628) RD1.1@-112.604,-25.106 ; -113.126,-24.89 ccw(c-113.126,-24.151) RD1.1@-112.604,-24.673 ; -113.126,-24.89 cw(c-113.126,-25.628) RD1.1@-112.604,-25.106 ; -113.126,-24.89 ccw(c-113.126,-24.151) RD1.1@-112.604,-24.673 ; -113.126,-24.89 cw(c-113.126,-25.628) RD1.1@-112.604,-25.106 ; -113.126,-24.89 ccw(c-113.126,-24.151) RD1.1@-112.604,-24.673 ; -113.126,-24.89 ccw(c-113.126,-24.151) RD1.1@-112.604,-24.673 ; -113.126,-24.89 cw(c-113.126,-25.628) RD1.1@-112.604,-25.106
  Bottom Layer w0.15: LAN1.2@-118.808,-19.384 -114.216,-19.384 -101.1,-32.5 -101.1,-48.9 -102.274,-50.074 -106.196,-50.074 J1.9@-106.841,-50.719 ; J1.9@-106.841,-50.722 -106.216,-50.097 ; LAN1.2@-118.516,-19.675 cw(c-117.812,-20.379) -117.812,-19.384 ; LAN1.2@-118.516,-19.675 cw(c-117.812,-20.379) -117.812,-19.384 ; LAN1.2@-118.516,-19.675 cw(c-117.812,-20.379) -117.812,-19.384 ; LAN1.2@-118.516,-19.675 cw(c-117.812,-20.379) -117.812,-19.384 ; LAN1.2@-118.516,-19.675 cw(c-117.812,-20.379) -117.812,-19.384 ; LAN1.2@-118.516,-19.092 ccw(c-117.812,-18.388) -117.812,-19.384 ; LAN1.2@-118.516,-19.092 ccw(c-117.812,-18.388) -117.812,-19.384 ; LAN1.2@-118.516,-19.092 ccw(c-117.812,-18.388) -117.812,-19.384 ; LAN1.2@-118.516,-19.092 ccw(c-117.812,-18.388) -117.812,-19.384 ; LAN1.2@-118.516,-19.092 ccw(c-117.812,-18.388) -117.812,-19.384 ; LAN1.2@-118.41,-19.781 cw(c-117.45,-20.742) -117.45,-19.384 ; LAN1.2@-118.41,-19.781 cw(c-117.45,-20.742) -117.45,-19.384 ; LAN1.2@-118.41,-19.781 cw(c-117.45,-20.742) -117.45,-19.384 ; LAN1.2@-118.41,-19.781 cw(c-117.45,-20.742) -117.45,-19.384 ; LAN1.2@-118.41,-19.781 cw(c-117.45,-20.742) -117.45,-19.384 ; LAN1.2@-118.41,-18.986 ccw(c-117.45,-18.026) -117.45,-19.384 ; LAN1.2@-118.41,-18.986 ccw(c-117.45,-18.026) -117.45,-19.384 ; LAN1.2@-118.41,-18.986 ccw(c-117.45,-18.026) -117.45,-19.384 ; LAN1.2@-118.41,-18.986 ccw(c-117.45,-18.026) -117.45,-19.384 ; LAN1.2@-118.41,-18.986 ccw(c-117.45,-18.026) -117.45,-19.384 ; LAN1.2@-118.304,-19.888 cw(c-117.088,-21.104) -117.088,-19.384 ; LAN1.2@-118.304,-19.888 cw(c-117.088,-21.104) -117.088,-19.384 ; LAN1.2@-118.304,-19.888 cw(c-117.088,-21.104) -117.088,-19.384 ; LAN1.2@-118.304,-19.888 cw(c-117.088,-21.104) -117.088,-19.384 ; LAN1.2@-118.304,-19.888 cw(c-117.088,-21.104) -117.088,-19.384 ; LAN1.2@-118.304,-18.88 ccw(c-117.088,-17.664) -117.088,-19.384 ; LAN1.2@-118.304,-18.88 ccw(c-117.088,-17.664) -117.088,-19.384 ; LAN1.2@-118.304,-18.88 ccw(c-117.088,-17.664) -117.088,-19.384 ; LAN1.2@-118.304,-18.88 ccw(c-117.088,-17.664) -117.088,-19.384 ; LAN1.2@-118.304,-18.88 ccw(c-117.088,-17.664) -117.088,-19.384 ; J1.9@-106.841,-50.547 ccw(c-106.841,-50.124) J1.9@-106.542,-50.423 ; J1.9@-106.841,-50.547 ccw(c-106.841,-50.124) J1.9@-106.542,-50.423 ; J1.9@-106.841,-50.547 ccw(c-106.841,-50.124) J1.9@-106.542,-50.423 ; J1.9@-106.841,-50.397 ccw(c-106.841,-49.612) -106.286,-50.167 ; J1.9@-106.841,-50.397 ccw(c-106.841,-49.612) -106.286,-50.167 ; J1.9@-106.841,-50.397 ccw(c-106.841,-49.612) -106.286,-50.167 ; J1.9@-106.791,-50.394 ccw(c-106.791,-49.73) -106.321,-50.2 cw(c-106.791,-49.73) J1.9@-106.791,-50.394 ; J1.9@-106.791,-50.394 ccw(c-106.791,-49.724) -106.317,-50.198 cw(c-106.791,-49.724) J1.9@-106.791,-50.394 ; J1.9@-106.666,-50.722 cw(c-106.243,-50.722) J1.9@-106.542,-50.423 ; J1.9@-106.666,-50.722 cw(c-106.243,-50.722) J1.9@-106.542,-50.423 ; J1.9@-106.666,-50.722 cw(c-106.243,-50.722) J1.9@-106.542,-50.423 ; J1.9@-106.516,-50.722 cw(c-105.731,-50.722) -106.286,-50.167 ; J1.9@-106.516,-50.722 cw(c-105.731,-50.722) -106.286,-50.167 ; J1.9@-106.516,-50.722 cw(c-105.731,-50.722) -106.286,-50.167 ; -106.216,-50.097 ccw(c-105.612,-50.701) -106.466,-50.714 cw(c-105.612,-50.701) -106.216,-50.097 ; J1.9@-106.616,-50.719 cw(c-106.073,-50.719) -106.457,-50.335 ccw(c-106.073,-50.719) J1.9@-106.616,-50.719 ; J1.9@-106.616,-50.717 cw(c-106.105,-50.709) -106.466,-50.347 ccw(c-106.105,-50.709) J1.9@-106.616,-50.717 ; J1.9@-106.466,-50.719 cw(c-105.56,-50.719) -106.201,-50.079 ccw(c-105.56,-50.719) J1.9@-106.466,-50.719
TXD: CON11.2 U9.3 | length 22.4
  Top Layer w0.15: CON11.2@-82.61,-80.878 -79.722,-80.878 -78.6,-82 -70.8,-82 -70.06,-82.74 U9.3@-70.06,-84.1 ; CON11.2@-81.717,-81.197 cw(c-80.947,-81.966) -80.947,-80.878 cw(c-80.947,-79.791) CON11.2@-81.717,-80.56 ; CON11.2@-81.61,-81.303 cw(c-80.585,-82.328) -80.585,-80.878 cw(c-80.585,-79.428) CON11.2@-81.61,-80.454 ; CON11.2@-81.504,-81.409 cw(c-80.223,-82.69) -80.223,-80.878 cw(c-80.223,-79.066) CON11.2@-81.504,-80.348 ; U9.3@-70.222,-83.226 ccw(c-70.615,-82.834) -70.06,-82.834 ccw(c-69.505,-82.834) U9.3@-69.898,-83.226
TXD0: CON8.1 J1.41 U5.11 | length 164.7
  Top Layer w0.15: CON8.1@-56.122,-30.21 -56.122,-27.822 -55.2,-26.9 -52.2,-26.9 -51.8,-26.5 -51.8,-26.1 -51.8,-23.2 -52.25,-22.75 U5.11@-53.912,-22.75 ; v1@-51.888,-25.988 cw(c-52.102,-26.202) -51.8,-26.202 cw(c-51.498,-26.202) v1@-51.712,-25.988 ; v1@-51.888,-25.812 ccw(c-52.102,-25.598) -51.8,-25.598 ccw(c-51.498,-25.598) v1@-51.712,-25.812 ; CON8.1@-56.652,-29.104 ccw(c-57.934,-27.823) -56.122,-27.823 ; CON8.1@-56.652,-29.104 ccw(c-57.934,-27.823) -56.122,-27.823 ; CON8.1@-56.652,-29.104 ccw(c-57.934,-27.823) -56.122,-27.823 ; CON8.1@-56.652,-29.104 ccw(c-57.934,-27.823) -56.122,-27.823 ; CON8.1@-56.652,-29.104 ccw(c-57.934,-27.823) -56.122,-27.823 ; CON8.1@-56.546,-29.21 ccw(c-57.572,-28.185) -56.122,-28.185 ; CON8.1@-56.546,-29.21 ccw(c-57.572,-28.185) -56.122,-28.185 ; CON8.1@-56.546,-29.21 ccw(c-57.572,-28.185) -56.122,-28.185 ; CON8.1@-56.546,-29.21 ccw(c-57.572,-28.185) -56.122,-28.185 ; CON8.1@-56.546,-29.21 ccw(c-57.572,-28.185) -56.122,-28.185 ; CON8.1@-56.44,-29.317 ccw(c-57.209,-28.547) -56.122,-28.547 ; CON8.1@-56.44,-29.317 ccw(c-57.209,-28.547) -56.122,-28.547 ; CON8.1@-56.44,-29.317 ccw(c-57.209,-28.547) -56.122,-28.547 ; CON8.1@-56.44,-29.317 ccw(c-57.209,-28.547) -56.122,-28.547 ; CON8.1@-56.44,-29.317 ccw(c-57.209,-28.547) -56.122,-28.547 ; -56.122,-28.547 ccw(c-55.034,-28.547) CON8.1@-55.803,-29.317 ; -56.122,-28.547 ccw(c-55.034,-28.547) CON8.1@-55.803,-29.317 ; -56.122,-28.547 ccw(c-55.034,-28.547) CON8.1@-55.803,-29.317 ; -56.122,-28.547 ccw(c-55.034,-28.547) CON8.1@-55.803,-29.317 ; -56.122,-28.547 ccw(c-55.034,-28.547) CON8.1@-55.803,-29.317 ; -56.122,-28.185 ccw(c-54.672,-28.185) CON8.1@-55.697,-29.21 ; -56.122,-28.185 ccw(c-54.672,-28.185) CON8.1@-55.697,-29.21 ; -56.122,-28.185 ccw(c-54.672,-28.185) CON8.1@-55.697,-29.21 ; -56.122,-28.185 ccw(c-54.672,-28.185) CON8.1@-55.697,-29.21 ; -56.122,-28.185 ccw(c-54.672,-28.185) CON8.1@-55.697,-29.21 ; -56.122,-27.823 ccw(c-54.31,-27.823) CON8.1@-55.591,-29.104 ; -56.122,-27.823 ccw(c-54.31,-27.823) CON8.1@-55.591,-29.104 ; -56.122,-27.823 ccw(c-54.31,-27.823) CON8.1@-55.591,-29.104 ; -56.122,-27.823 ccw(c-54.31,-27.823) CON8.1@-55.591,-29.104 ; -56.122,-27.823 ccw(c-54.31,-27.823) CON8.1@-55.591,-29.104 ; U5.11@-53.038,-22.912 cw(c-52.646,-23.305) -52.646,-22.75 ; U5.11@-53.038,-22.912 cw(c-52.646,-23.305) -52.646,-22.75 ; U5.11@-53.038,-22.912 cw(c-52.646,-23.305) -52.646,-22.75 ; U5.11@-53.038,-22.912 cw(c-52.646,-23.305) -52.646,-22.75 ; U5.11@-53.038,-22.912 cw(c-52.646,-23.305) -52.646,-22.75 ; U5.11@-53.038,-22.588 ccw(c-52.646,-22.195) -52.646,-22.75 ; U5.11@-53.038,-22.588 ccw(c-52.646,-22.195) -52.646,-22.75 ; U5.11@-53.038,-22.588 ccw(c-52.646,-22.195) -52.646,-22.75 ; U5.11@-53.038,-22.588 ccw(c-52.646,-22.195) -52.646,-22.75 ; U5.11@-53.038,-22.588 ccw(c-52.646,-22.195) -52.646,-22.75 ; v1@-51.924,-26.024 cw(c-52.222,-26.322) -51.8,-26.322 ; v1@-51.924,-26.024 cw(c-52.222,-26.322) -51.8,-26.322 ; v1@-51.924,-26.024 cw(c-52.222,-26.322) -51.8,-26.322 ; v1@-51.924,-26.024 cw(c-52.222,-26.322) -51.8,-26.322 ; v1@-51.924,-25.776 ccw(c-52.222,-25.478) -51.8,-25.478 ; v1@-51.924,-25.776 ccw(c-52.222,-25.478) -51.8,-25.478 ; v1@-51.924,-25.776 ccw(c-52.222,-25.478) -51.8,-25.478 ; v1@-51.924,-25.776 ccw(c-52.222,-25.478) -51.8,-25.478 ; -51.8,-26.322 cw(c-51.378,-26.322) v1@-51.676,-26.024 ; -51.8,-26.322 cw(c-51.378,-26.322) v1@-51.676,-26.024 ; -51.8,-26.322 cw(c-51.378,-26.322) v1@-51.676,-26.024 ; -51.8,-26.322 cw(c-51.378,-26.322) v1@-51.676,-26.024 ; -51.8,-25.478 ccw(c-51.378,-25.478) v1@-51.676,-25.776 ; -51.8,-25.478 ccw(c-51.378,-25.478) v1@-51.676,-25.776 ; -51.8,-25.478 ccw(c-51.378,-25.478) v1@-51.676,-25.776 ; -51.8,-25.478 ccw(c-51.378,-25.478) v1@-51.676,-25.776
  Bottom Layer w0.15: J1.41@-106.841,-71.056 -106.195,-70.41 -101.41,-70.41 -97.4,-66.4 -97.4,-30.2 -93.1,-25.9 v1(-51.8,-25.9) ; v1@-51.888,-25.988 ccw(c-52.102,-26.202) -52.102,-25.9 ccw(c-52.102,-25.598) v1@-51.888,-25.812 ; J1.41@-106.841,-70.881 ccw(c-106.841,-70.458) J1.41@-106.542,-70.757 ; J1.41@-106.841,-70.881 ccw(c-106.841,-70.458) J1.41@-106.542,-70.757 ; J1.41@-106.841,-70.881 ccw(c-106.841,-70.458) J1.41@-106.542,-70.757 ; J1.41@-106.841,-70.731 ccw(c-106.841,-69.946) -106.286,-70.501 ; J1.41@-106.841,-70.731 ccw(c-106.841,-69.946) -106.286,-70.501 ; J1.41@-106.841,-70.731 ccw(c-106.841,-69.946) -106.286,-70.501 ; J1.41@-106.666,-71.056 cw(c-106.243,-71.056) J1.41@-106.542,-70.757 ; J1.41@-106.666,-71.056 cw(c-106.243,-71.056) J1.41@-106.542,-70.757 ; J1.41@-106.666,-71.056 cw(c-106.243,-71.056) J1.41@-106.542,-70.757 ; J1.41@-106.516,-71.056 cw(c-105.731,-71.056) -106.286,-70.501 ; J1.41@-106.516,-71.056 cw(c-105.731,-71.056) -106.286,-70.501 ; J1.41@-106.516,-71.056 cw(c-105.731,-71.056) -106.286,-70.501 ; -52.222,-25.9 cw(c-52.222,-26.322) v1@-51.924,-26.024 ; -52.222,-25.9 ccw(c-52.222,-25.478) v1@-51.924,-25.776 ; -52.222,-25.9 cw(c-52.222,-26.322) v1@-51.924,-26.024 ; -52.222,-25.9 ccw(c-52.222,-25.478) v1@-51.924,-25.776 ; -52.222,-25.9 cw(c-52.222,-26.322) v1@-51.924,-26.024 ; -52.222,-25.9 ccw(c-52.222,-25.478) v1@-51.924,-25.776 ; -52.222,-25.9 ccw(c-52.222,-25.478) v1@-51.924,-25.776 ; -52.222,-25.9 cw(c-52.222,-26.322) v1@-51.924,-26.024 ; J1.41@-106.791,-70.714 ccw(c-106.791,-70.01) -106.293,-70.508 cw(c-106.791,-70.01) J1.41@-106.791,-70.714 ; J1.41@-106.616,-71.039 cw(c-106.113,-71.039) -106.468,-70.684 ccw(c-106.113,-71.039) J1.41@-106.616,-71.039 ; J1.41@-106.466,-71.039 cw(c-105.601,-71.039) -106.212,-70.428 ccw(c-105.601,-71.039) J1.41@-106.466,-71.039
TXD1: CON9.1 J1.49 U6.11 | length 153.5
  Top Layer w0.15: U6.11@-72.712,-22.75 -69.85,-22.75 -67.122,-25.478 v1(-67.122,-27.7) CON9.1@-67.122,-30.21 ; v1@-67.21,-27.788 cw(c-67.424,-28.002) -67.122,-28.002 cw(c-66.82,-28.002) v1@-67.033,-27.788 ; v1@-67.21,-27.612 ccw(c-67.424,-27.398) -67.122,-27.398 ccw(c-66.82,-27.398) v1@-67.033,-27.612 ; U6.11@-71.838,-22.912 cw(c-71.446,-23.305) -71.446,-22.75 ; U6.11@-71.838,-22.912 cw(c-71.446,-23.305) -71.446,-22.75 ; U6.11@-71.838,-22.912 cw(c-71.446,-23.305) -71.446,-22.75 ; U6.11@-71.838,-22.912 cw(c-71.446,-23.305) -71.446,-22.75 ; U6.11@-71.838,-22.912 cw(c-71.446,-23.305) -71.446,-22.75 ; U6.11@-71.838,-22.588 ccw(c-71.446,-22.195) -71.446,-22.75 ; U6.11@-71.838,-22.588 ccw(c-71.446,-22.195) -71.446,-22.75 ; U6.11@-71.838,-22.588 ccw(c-71.446,-22.195) -71.446,-22.75 ; U6.11@-71.838,-22.588 ccw(c-71.446,-22.195) -71.446,-22.75 ; U6.11@-71.838,-22.588 ccw(c-71.446,-22.195) -71.446,-22.75 ; CON9.1@-67.652,-29.104 ccw(c-68.934,-27.823) v1@-67.122,-27.823 ; CON9.1@-67.652,-29.104 ccw(c-68.934,-27.823) v1@-67.122,-27.823 ; CON9.1@-67.652,-29.104 ccw(c-68.934,-27.823) v1@-67.122,-27.823 ; CON9.1@-67.652,-29.104 ccw(c-68.934,-27.823) v1@-67.122,-27.823 ; CON9.1@-67.652,-29.104 ccw(c-68.934,-27.823) v1@-67.122,-27.823 ; CON9.1@-67.546,-29.21 ccw(c-68.572,-28.185) -67.122,-28.185 ; CON9.1@-67.546,-29.21 ccw(c-68.572,-28.185) -67.122,-28.185 ; CON9.1@-67.546,-29.21 ccw(c-68.572,-28.185) -67.122,-28.185 ; CON9.1@-67.546,-29.21 ccw(c-68.572,-28.185) -67.122,-28.185 ; CON9.1@-67.546,-29.21 ccw(c-68.572,-28.185) -67.122,-28.185 ; CON9.1@-67.44,-29.317 ccw(c-68.209,-28.547) -67.122,-28.547 ; CON9.1@-67.44,-29.317 ccw(c-68.209,-28.547) -67.122,-28.547 ; CON9.1@-67.44,-29.317 ccw(c-68.209,-28.547) -67.122,-28.547 ; CON9.1@-67.44,-29.317 ccw(c-68.209,-28.547) -67.122,-28.547 ; CON9.1@-67.44,-29.317 ccw(c-68.209,-28.547) -67.122,-28.547 ; v1@-67.246,-27.824 cw(c-67.544,-28.122) -67.122,-28.122 ; v1@-67.246,-27.824 cw(c-67.544,-28.122) -67.122,-28.122 ; v1@-67.246,-27.824 cw(c-67.544,-28.122) -67.122,-28.122 ; v1@-67.246,-27.824 cw(c-67.544,-28.122) -67.122,-28.122 ; v1@-67.246,-27.576 ccw(c-67.544,-27.278) -67.122,-27.278 ; v1@-67.246,-27.576 ccw(c-67.544,-27.278) -67.122,-27.278 ; v1@-67.246,-27.576 ccw(c-67.544,-27.278) -67.122,-27.278 ; v1@-67.246,-27.576 ccw(c-67.544,-27.278) -67.122,-27.278 ; -67.122,-28.547 ccw(c-66.034,-28.547) CON9.1@-66.803,-29.317 ; -67.122,-28.547 ccw(c-66.034,-28.547) CON9.1@-66.803,-29.317 ; -67.122,-28.547 ccw(c-66.034,-28.547) CON9.1@-66.803,-29.317 ; -67.122,-28.547 ccw(c-66.034,-28.547) CON9.1@-66.803,-29.317 ; -67.122,-28.547 ccw(c-66.034,-28.547) CON9.1@-66.803,-29.317 ; -67.122,-28.185 ccw(c-65.672,-28.185) CON9.1@-66.697,-29.21 ; -67.122,-28.185 ccw(c-65.672,-28.185) CON9.1@-66.697,-29.21 ; -67.122,-28.185 ccw(c-65.672,-28.185) CON9.1@-66.697,-29.21 ; -67.122,-28.185 ccw(c-65.672,-28.185) CON9.1@-66.697,-29.21 ; -67.122,-28.185 ccw(c-65.672,-28.185) CON9.1@-66.697,-29.21 ; -67.122,-28.122 cw(c-66.699,-28.122) v1@-66.998,-27.824 ; -67.122,-28.122 cw(c-66.699,-28.122) v1@-66.998,-27.824 ; -67.122,-28.122 cw(c-66.699,-28.122) v1@-66.998,-27.824 ; -67.122,-28.122 cw(c-66.699,-28.122) v1@-66.998,-27.824 ; v1@-67.122,-27.823 ccw(c-65.31,-27.823) CON9.1@-66.591,-29.104 ; v1@-67.122,-27.823 ccw(c-65.31,-27.823) CON9.1@-66.591,-29.104 ; v1@-67.122,-27.823 ccw(c-65.31,-27.823) CON9.1@-66.591,-29.104 ; v1@-67.122,-27.823 ccw(c-65.31,-27.823) CON9.1@-66.591,-29.104 ; v1@-67.122,-27.823 ccw(c-65.31,-27.823) CON9.1@-66.591,-29.104 ; -67.122,-27.278 ccw(c-66.699,-27.278) v1@-66.998,-27.576 ; -67.122,-27.278 ccw(c-66.699,-27.278) v1@-66.998,-27.576 ; -67.122,-27.278 ccw(c-66.699,-27.278) v1@-66.998,-27.576 ; -67.122,-27.278 ccw(c-66.699,-27.278) v1@-66.998,-27.576
  Bottom Layer w0.15: J1.49@-106.841,-76.139 -106.201,-75.5 ; J1.49@-106.841,-76.119 -106.196,-75.474 -103.574,-75.474 -95.9,-67.8 -95.9,-31.6 -92,-27.7 v1(-67.122,-27.7) ; v1@-67.21,-27.788 ccw(c-67.424,-28.002) -67.424,-27.7 ccw(c-67.424,-27.398) v1@-67.21,-27.612 ; J1.49@-106.841,-75.964 ccw(c-106.841,-75.542) J1.49@-106.542,-75.841 ; J1.49@-106.841,-75.964 ccw(c-106.841,-75.542) J1.49@-106.542,-75.841 ; J1.49@-106.841,-75.964 ccw(c-106.841,-75.542) J1.49@-106.542,-75.841 ; J1.49@-106.841,-75.814 ccw(c-106.841,-75.03) -106.286,-75.585 ; J1.49@-106.841,-75.814 ccw(c-106.841,-75.03) -106.286,-75.585 ; J1.49@-106.841,-75.814 ccw(c-106.841,-75.03) -106.286,-75.585 ; J1.49@-106.791,-75.794 ccw(c-106.791,-75.13) -106.321,-75.6 cw(c-106.791,-75.13) J1.49@-106.791,-75.794 ; J1.49@-106.791,-75.794 ccw(c-106.791,-75.082) -106.287,-75.586 cw(c-106.791,-75.082) J1.49@-106.791,-75.794 ; J1.49@-106.666,-76.139 cw(c-106.243,-76.139) J1.49@-106.542,-75.841 ; J1.49@-106.666,-76.139 cw(c-106.243,-76.139) J1.49@-106.542,-75.841 ; J1.49@-106.666,-76.139 cw(c-106.243,-76.139) J1.49@-106.542,-75.841 ; J1.49@-106.616,-76.119 cw(c-106.073,-76.119) -106.457,-75.735 ccw(c-106.073,-76.119) J1.49@-106.616,-76.119 ; J1.49@-106.616,-76.119 cw(c-106.121,-76.119) -106.471,-75.77 ccw(c-106.121,-76.119) J1.49@-106.616,-76.119 ; J1.49@-106.516,-76.139 cw(c-105.731,-76.139) -106.286,-75.585 ; J1.49@-106.516,-76.139 cw(c-105.731,-76.139) -106.286,-75.585 ; J1.49@-106.516,-76.139 cw(c-105.731,-76.139) -106.286,-75.585 ; J1.49@-106.466,-76.119 cw(c-105.56,-76.119) -106.201,-75.479 ccw(c-105.56,-76.119) J1.49@-106.466,-76.119 ; J1.49@-106.466,-76.119 cw(c-105.609,-76.119) -106.215,-75.514 ccw(c-105.609,-76.119) J1.49@-106.466,-76.119 ; -67.544,-27.7 cw(c-67.544,-28.122) v1@-67.246,-27.824 ; -67.544,-27.7 ccw(c-67.544,-27.278) v1@-67.246,-27.576 ; -67.544,-27.7 cw(c-67.544,-28.122) v1@-67.246,-27.824 ; -67.544,-27.7 ccw(c-67.544,-27.278) v1@-67.246,-27.576 ; -67.544,-27.7 cw(c-67.544,-28.122) v1@-67.246,-27.824 ; -67.544,-27.7 ccw(c-67.544,-27.278) v1@-67.246,-27.576 ; -67.544,-27.7 ccw(c-67.544,-27.278) v1@-67.246,-27.576 ; -67.544,-27.7 cw(c-67.544,-28.122) v1@-67.246,-27.824